# Altium PCB PCB-board-2layer-1.PcbDoc
Units mm, origin at the board's own origin, x right, y up, seen from the top; angles counter-clockwise.
Board outline 30 x 45 mm, 2 copper layers (Top Layer, Bottom Layer), stack 1.299 mm thick; 49 components, 48 nets, 232 pads, 55 vias.
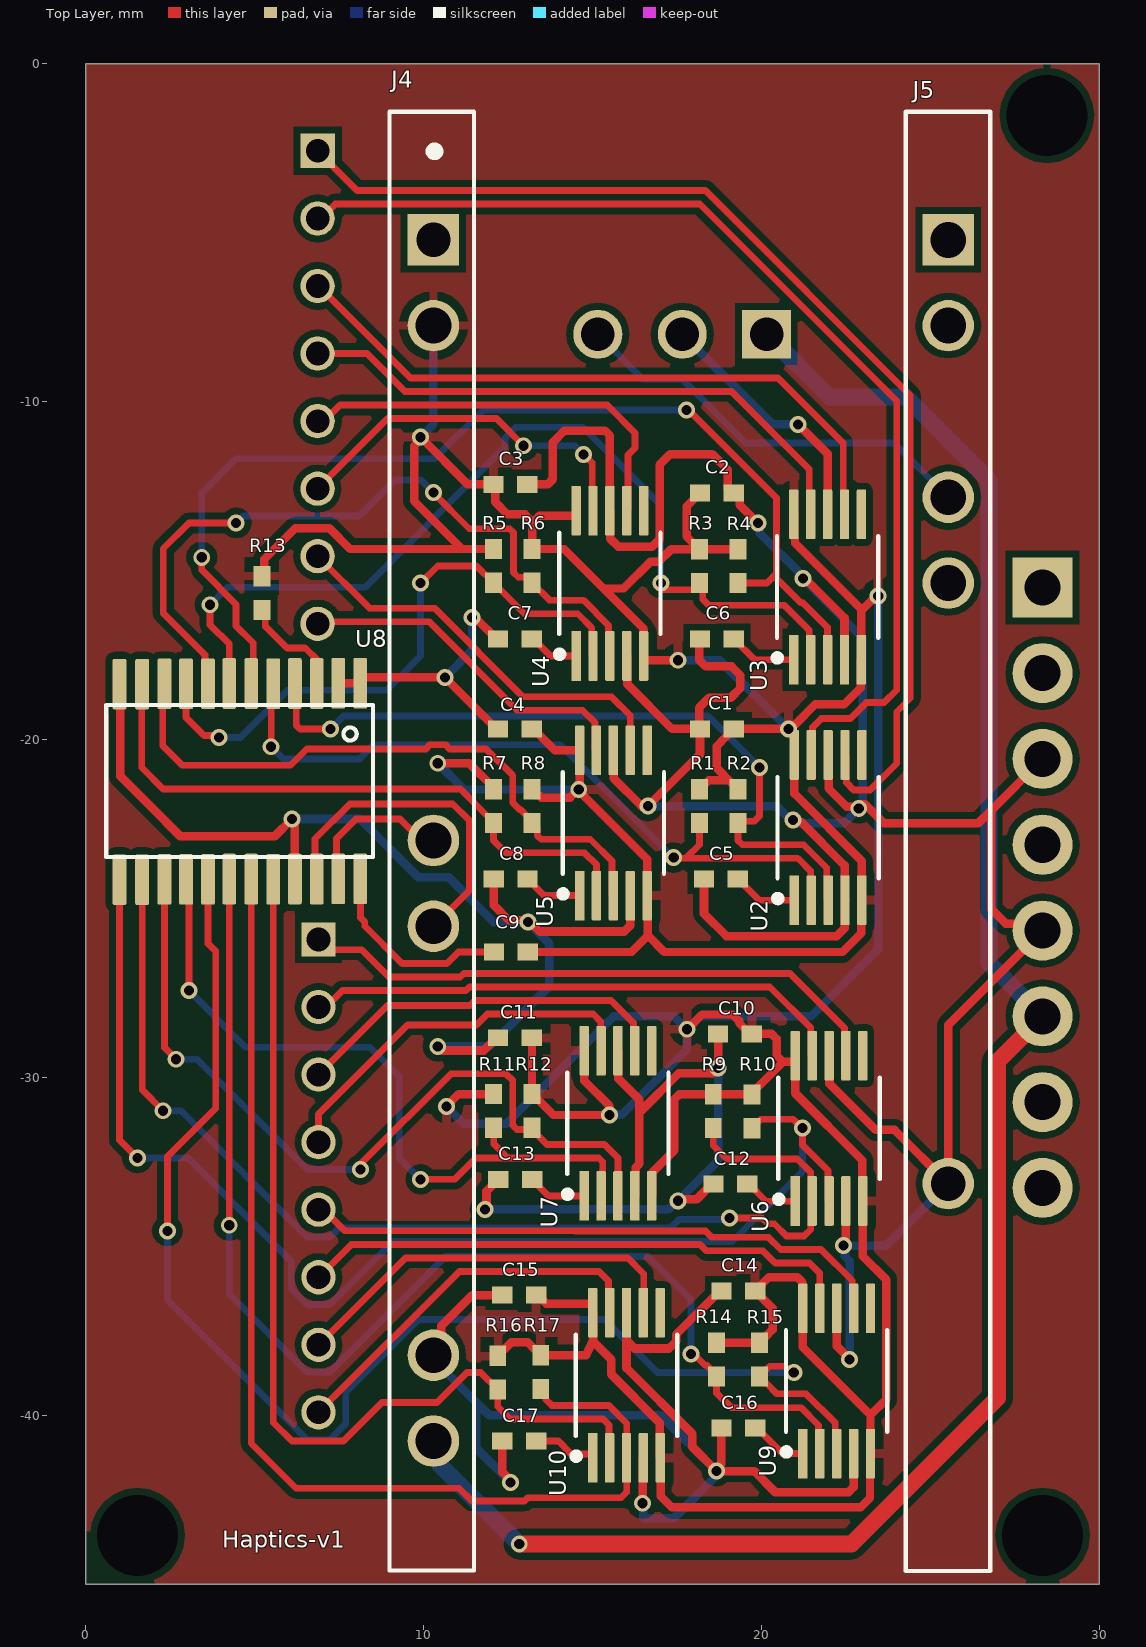
[diagram p0: Top Layer view]
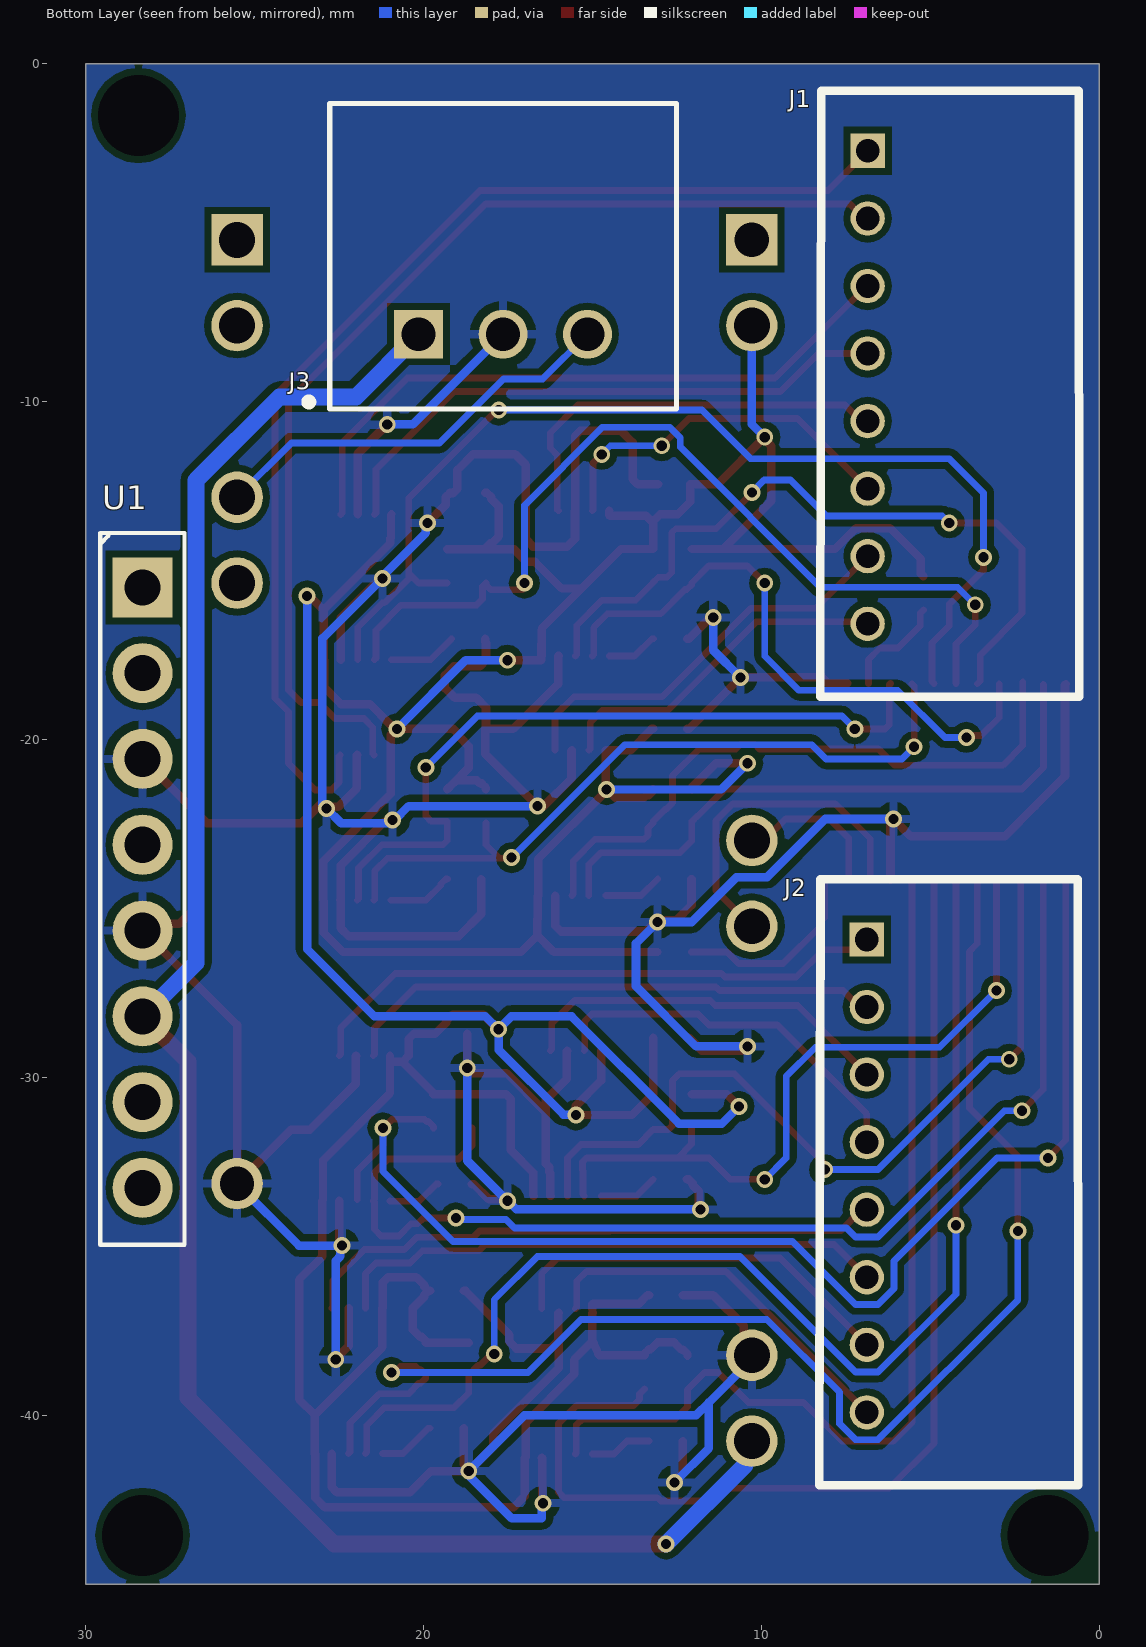
[diagram p1: Bottom Layer view, seen from below]

## Layer stack, top to bottom
Top Solder: solder mask 0.0254, SM-001, Dk 4
Top Layer: signal copper 0.035
Dielectric 1: prepreg 0.1295, PP-017, Dk 4.3
Dielectric 2: prepreg 0.1295, PP-017, Dk 4.3
Dielectric 3: core 0.7112, Core-039, Dk 4.8
Dielectric 4: prepreg 0.1295, PP-017, Dk 4.3
Dielectric 5: prepreg 0.1295, PP-017, Dk 4.3
Bottom Layer: signal copper 0.035
Bottom Solder: solder mask 0.0254, SM-001, Dk 4

## Board outline
0,-45 0,0 30,0 30,-45

## Design rules (kind name [scope] priority, off if disabled: settings)
Clearance [All] p1: gap=0.2 ignorepadtopadclearanceinfootprint=FALSE
ComponentClearance [All] p1: gap=0 collisioncheckmode=3 verticalgap=2540 showdistances=FALSE
HoleSize [All] p1: absolutevalues=TRUE maxlimit=4 minlimit=0.7 maxpercent=80.000 minpercent=20.000
HoleToHoleClearance [All] p1: gap=0.15 allowstackedmicrovias=TRUE
MinimumSolderMaskSliver [All] p1: minsoldermaskwidth=0.01
PlaneConnect [All] p1: planeconnectstyle=Relief reliefexpansion=0.508 reliefentries=4 reliefconductorwidth=0.5 reliefairgap=0.3
PolygonConnect [All] p1: connectstyle=Relief reliefconductorwidth=0.254 reliefentries=4 polygonreliefangle="90 Angle" airgapwidth=0.254
RoutingVias [All] p1: holewidth=0.3 width=0.5 viastyle="Through Hole" minholewidth=0.3 minwidth=0.5 maxholewidth=1.5 maxwidth=3
SilkToSilkClearance [All] p1: silktosilkclearance=0.01
SilkToSolderMaskClearance [IsPad] p1: minsilkscreentomaskgap=0.01 clearancetoexposedcopper=TRUE
SolderMaskExpansion [All] p1: expansion=0.102 istentingtop=FALSE
Width [All] p1: maxlimit=2 minlimit=0.2 preferedwidth=0.5
23 further rules are at their usual default settings.

## Classes and differential pairs
component class vtf-schem-v1: C1 C2 C3 C4 C5 C6 C7 C8 C9 C10 C11 C12 C13 C14 C15 C16 C17 R1 R2 R3 R4 R5 R6 R7 R8 R9 R10 R11 R12 R13 R14 R15 R16 R17 U2 U3 U4 U5 U6 U7 U8 U9 U10
component class main-schem-v1: J1 J2 J3 U1

## Components (designator, comment, footprint, x,y, rotation, side; value= is the part's Value field where it differs from the comment)
C1 "Cap Pol3" 0402 18.677,-19.685 r180 top value=1uF
C2 "Cap Pol3" 0402 18.677,-12.7 r0 top value=1uF
C3 "Cap Pol3" 0402 12.565,-12.446 r0 top value=1uF
C4 "Cap Pol3" 0402 12.7,-19.685 r180 top value=1uF
C5 "Cap Pol3" 0402 18.796,-24.13 r180 top value=1uF
C6 "Cap Pol3" 0402 18.677,-17.018 r180 top value=1uF
C7 "Cap Pol3" 0402 12.7,-17.018 r180 top value=1uF
C8 "Cap Pol3" 0402 12.573,-24.13 r180 top value=1uF
C9 "Cap Pol3" 0402 12.581,-26.289 r180 top value=1uF
C10 "Cap Pol3" 0402 19.213,-28.714 r180 top value=1uF
C11 "Cap Pol3" 0402 12.7,-28.829 r180 top value=1uF
C12 "Cap Pol3" 0402 19.078,-33.159 r180 top value=1uF
C13 "Cap Pol3" 0402 12.708,-33.02 r180 top value=1uF
C14 "Cap Pol3" 0402 19.312,-36.322 r180 top value=1uF
C15 "Cap Pol3" 0402 12.827,-36.449 r180 top value=1uF
C16 "Cap Pol3" 0402 19.312,-40.386 r180 top value=1uF
C17 "Cap Pol3" 0402 12.827,-40.767 r180 top value=1uF
J1 "8-pin-connector" 8-PIN-CONNECTOR 8.229,-0.785 r180 bottom
J2 "8-pin-connector" 8-PIN-CONNECTOR 8.255,-24.13 r180 bottom
J3 "3-pin-connector" "3-pin-connector - duplicate" 22.943,-1.035 r180 bottom
J4 "A" "15-PIN-CONNECTOR  a - duplicate" 8.987,-1.417 r0 top
J5 "15-pin-connector b" "15-PIN-CONNECTOR b - duplicate" 25.527,-22.987 r0 top
R1 "Res3" 0402 18.161,-21.971 r270 top value=2.2K
R2 "Res3" 0402 19.304,-21.971 r270 top value=2.2K
R3 "Res3" 0402 18.161,-14.867 r270 top value=2.2K
R4 "Res3" 0402 19.304,-14.867 r270 top value=2.2K
R5 "Res3" 0402 12.065,-14.859 r270 top value=2.2K
R6 "Res3" 0402 13.208,-14.859 r270 top value=2.2K
R7 "Res3" 0402 12.065,-21.971 r270 top value=2.2K
R8 "Res3" 0402 13.208,-21.971 r270 top value=2.2K
R9 "Res3" 0402 18.57,-31 r270 top value=2.2K
R10 "Res3" 0402 19.713,-31.008 r270 top value=2.2K
R11 "Res3" 0402 12.065,-30.996 r270 top value=2.2K
R12 "Res3" 0402 13.208,-30.996 r270 top value=2.2K
R13 "Res3" 0402 5.207,-15.664 r270 top value=10K
R14 "Res3" 0402 18.669,-38.354 r270 top value=2.2K
R15 "Res3" 0402 19.939,-38.354 r270 top value=2.2K
R16 "Res3" 0402 12.192,-38.743 r270 top value=2.2K
R17 "Res3" 0402 13.462,-38.727 r270 top value=2.2K
U1 "Powerboost 500" "PowerBoost 500" 29.581,-13.884 r180 bottom
U2 "DRV2605LDGST" Driver 21.971,-22.606 r90 top
U3 "DRV2605LDGST" Driver 21.955,-15.485 r90 top
U4 "DRV2605LDGST" Driver 15.51,-15.376 r90 top
U5 "DRV2605LDGST" Driver 15.613,-22.47 r90 top
U6 "DRV2605LDGST" Driver 21.999,-31.508 r90 top
U7 "DRV2605LDGST" Driver 15.748,-31.36 r90 top
U8 "I2C Bus" "I2C bus" 8.5,-18.975 r270 top
U9 "DRV2605LDGST" Driver 22.225,-38.989 r90 top
U10 "DRV2605LDGST" Driver 16.002,-39.116 r90 top

## Footprints (in the part's own frame and the unit in brackets; to place one, negate y for a bottom-side part, rotate by r counter-clockwise, add the part's x,y. Pads: shape width x height; smd on the part's side, far side on the other; paste and mask are expansions set on the pad)
"3-pin-connector - duplicate" [mm] "through hole"
  rect 1.449x1.449 hole 1: 1(2.79,-6.966)
  round 1.449 hole 1: 2(5.29,-6.966) 3(7.79,-6.966)
  silkscreen extent -0.55,-9.18 10.42,-0.14, body extent 2.79,-6.97 3.04,-6.71, height 0.25
8-PIN-CONNECTOR [mil]
  rect 40x40 hole 27.56: 1(53.97,-70.39)
  round 40 hole 27.56: 2(53.97,-149.13) 3(53.97,-227.87) 4(53.97,-306.61) 5(53.97,-385.35) 6(53.97,-464.09) 7(53.97,-542.83) 8(53.97,-621.58)
  silkscreen extent -1,-707 301,0
"15-PIN-CONNECTOR  a - duplicate" [mil] "Arduino Nano 33 BLE a"
  rect 60x60 hole 40: 1(51.18,-149.21)
  round 60 hole 41.77: 2(51.18,-249.21) 8(51.18,-849.21) 9(51.18,-949.21) 14(51.18,-1449.21) 15(51.18,-1549.21)
  round 60 on Mech1: 3(51.18,-349.21) 4(51.18,-449.21) 5(51.18,-549.21) 6(51.18,-649.21) 7(51.18,-749.21) 10(51.18,-1049.21) 11(51.18,-1149.21) 12(51.18,-1249.21) 13(51.18,-1349.21)
  silkscreen extent 0,-1700 98,0
"15-PIN-CONNECTOR b - duplicate" [mil] "Arduino Nano 33 BLE b"
  rect 60x60 hole 41.77: 16(0,700)
  round 60 hole 41.77: 17(0,600) 19(0,400) 20(0,300)
  round 60 on Mech1: 18(0,500) 21(0,200) 22(0,100) 23(0,0) 24(0,-100) 25(0,-200) 26(0,-300) 28(0,-500) 29(0,-600) 30(0,-700)
  round 60 hole 40: 27(0,-400)
  silkscreen extent -50,-852 49,849
0402 [mm] "Chip Capacitor, Body 1.0x0.5mm, IPC High Density"
  rect 0.6x0.5 smd: 1(-0.5,0) 2(0.5,0)
  body extent -0.55,-0.3 0.55,0.3, height 1.3
Driver [mm] "DRV2605LDGST"
  rect 1.47x0.28 smd: 1(-2.15,1)
  rrect25% 1.47x0.28 smd: 2(-2.15,0.5) 3(-2.15,0) 4(-2.15,-0.5) 5(-2.15,-1) 6(2.15,-1) 7(2.15,-0.5) 8(2.15,0) 9(2.15,0.5) 10(2.15,1)
  silkscreen extent -2.2,-1.5 1.5,1.59
"I2C bus" [mm] "PI4MSD5V9548A"
  rrect25% 1.5x0.41 smd: 1(-0.64,-0.38) 2(-0.64,-1.03) 3(-0.635,-1.666) 4(-0.635,-2.316) 5(-0.625,-2.956) 6(-0.635,-3.606) 7(-0.635,-4.256) 8(-0.625,-4.886) 9(-0.625,-5.536) 10(-0.625,-6.176) 11(-0.615,-6.836) 12(-0.615,-7.506) 13(5.175,-7.506) 14(5.175,-6.836) 15(5.165,-6.176) 16(5.165,-5.536) 17(5.165,-4.886) 18(5.155,-4.256) 19(5.155,-3.606) 20(5.165,-2.956) 21(5.155,-2.316) 22(5.155,-1.666) 23(5.15,-1.03) 24(5.15,-0.38)
  silkscreen extent 0,-7.9 4.5,0
"PowerBoost 500" [mm] "Adafruit PowerBoost 500 + Charger"
  rect 1.778x1.778 hole 1.07: 1(1.26,-1.61)
  round 1.778 hole 1.07: 2(1.26,-4.15) 3(1.26,-6.69) 4(1.26,-9.23) 5(1.26,-11.77) 6(1.26,-14.31) 7(1.26,-16.85) 8(1.26,-19.39)
  silkscreen extent 0,-21.07 2.5,0

## Part data
C1 C2 C3 C4 C5 C6 C7 C8 C9 C10 C11 C12 C13 C14 C15 C16 C17: "Polarized Capacitor (Surface Mount)", LatestRevisionDate=29-May-2009, LatestRevisionNote="IPC-7351 Footprint Added.", PackageDescription="Chip Capacitor", Published=8-Jun-2000, Publisher="Altium Limited"
  C1 C2 C3 C4 C6 C7 C8 C9 C10 C11 C12 C13 C14 C15 C16 C17: PackageReference=C0805
  C5: PackageReference=0402
J4: library part 15-pin-connector
R1 R2 R3 R4 R5 R6 R7 R8 R9 R10 R11 R12 R13 R14 R15 R16 R17: "Resistor", LatestRevisionDate=29-May-2009, LatestRevisionNote="IPC-7351 Footprint Added.", PackageDescription="Chip Resistor", PackageReference=J1-0603, Published=8-Jun-2000, Publisher="Altium Limited"

## Free pads (board coordinates)
  round 1.449 hole 2.4: MH1(28.448,-1.524) MH2(28.321,-43.561) MH3(1.524,-43.561)

## Via types
v1: diameter 0.5, hole 0.3, Top Layer to Bottom Layer, 55 vias

## Nets (pads, with @x,y where several pads share a name; then routed paths per layer and width w, separated by ;. In a path a pad name is that pad's centre, name@x,y a point inside that pad or via, vN(x,y) a via of type N, cw(c..) or ccw(c..) an arc to the next point about the centre after c; other vN are vias at no path point)
3V3: C1.1 C2.1 C3.1 C4.1 C9.1 C10.1 C11.1 C14.1 C15.1 J4.2 R1.1 R2.1 R3.1 R4.1 R5.1 R6.1 R7.1 R8.1 R9.1 R10.1 R11.1 R12.1 R13.1 R14.1 R15.1 R16.1 R17.1 U2.5 U2.10 U3.5 U3.10 U4.5 U4.10 U5.5 U5.10 U6.5 U6.10 U7.5 U7.10 U9.5 U9.10 U10.5 U10.10 | length 178.3
  Top Layer w0.25: R13.1 5.281,-15.09 5.281,-14.658 6.199,-13.74 7.203,-13.74 7.822,-14.359 11.133,-14.359 ; v1(10.414,-20.701) 11.345,-20.701 12.065,-21.421 R7.1 ; v1(10.668,-30.861) 11.033,-30.496 R11.1 ; R5.1 11.133,-14.359 ; R16.1 12.192,-38.193 12.317,-38.068 12.367,-38.068 12.589,-37.846 13.081,-37.846 13.287,-38.052 13.337,-38.052 13.462,-38.177 R17.1 14.811,-38.227 14.877,-38.076 15.017,-37.75 ; C9.1 16.153,-26.289 16.637,-25.805 ; C11.1 13.204,-28.833 13.204,-30.492 R12.1 13.218,-30.496 13.837,-31.115 v1(15.494,-31.115) 15.494,-30.841 14.748,-30.094 U7.10 ; C4.1 13.25,-19.685 13.885,-20.32 U5.10 14.613,-21.463 v1@14.609,-21.467 ; R8.1 13.208,-21.521 13.333,-21.646 13.408,-21.646 13.479,-21.717 14.334,-21.717 14.572,-21.479 v1(14.589,-21.479) ; C15.1 13.377,-36.449 13.631,-36.703 14.995,-36.703 15.01,-36.718 U10.10@15.01,-36.848 ; U4.10 14.51,-13.361 14.495,-13.376 13.421,-13.376 13.208,-13.589 ; v1@14.613,-21.478 14.613,-21.538 16.613,-23.538 U5.5 16.628,-24.635 16.628,-25.313 16.637,-25.322 16.637,-25.805 ; U10.10 15.017,-36.981 15.017,-37.75 ; 16.495,-16.697 15.326,-15.528 ; U4.5 16.51,-16.764 16.519,-17.526 16.521,-17.653 v1(17.526,-17.653) ; U7.5 16.763,-33.495 16.763,-32.817 17.42,-32.16 17.42,-30.646 17.567,-30.499 18.569,-30.499 R9.1 18.574,-30.504 19.709,-30.504 R10.1 ; U10.5 16.987,-41.251 16.987,-40.228 15.55,-38.791 15.55,-38.357 15.017,-37.824 15.017,-37.75 ; U10.5@17.01,-41.266 17.01,-42.399 17.343,-42.732 22.931,-42.732 23.21,-42.453 23.21,-41.154 U9.5 23.225,-39.997 ; v1(17.792,-28.575) 17.805,-28.575 18.24,-28.139 19.147,-28.139 19.338,-28.33 19.338,-28.389 19.663,-28.714 C10.1 20.301,-28.714 20.447,-28.861 20.447,-29.358 20.63,-29.541 ; R1.1 18.161,-21.421 18.286,-21.296 18.345,-21.296 18.432,-21.209 19.033,-21.209 19.12,-21.296 R2.1@19.129,-21.296 ; C2.1 18.127,-12.7 18.002,-12.825 18.002,-12.875 17.78,-13.097 17.78,-13.986 17.986,-14.192 18.036,-14.192 18.161,-14.317 R3.1 ; R14.1 R15.1 19.939,-37.804 20.064,-37.679 20.114,-37.679 20.326,-37.467 20.326,-36.834 19.987,-36.495 19.987,-36.447 C14.1@19.862,-36.322 ; R2.1 R2.1@19.129,-21.296 ; R4.1 R3.1 ; R10.1@19.713,-30.458 20.63,-29.541 ; C14.1 C14.1@19.862,-36.322 ; U3.10 20.97,-13.35 20.97,-14.028 20.99,-14.048 20.99,-14.184 22.955,-16.149 ; v1@20.986,-19.561 21.595,-18.953 22.451,-18.953 22.94,-18.464 22.94,-17.65 U3.5 22.955,-16.149 ; U6.10@20.999,-29.602 20.999,-30.472 22.984,-32.457 22.984,-33.643 U6.5 22.999,-35.298 23.69,-35.99 23.69,-39.532 23.225,-39.997 ; U6.10 20.999,-29.526 20.984,-29.541 20.63,-29.541 ; v1(23.453,-15.748) 23.385,-15.748 22.984,-16.149 22.955,-16.149 ; 11.133,-14.359 9.712,-12.938 9.712,-11.311 9.906,-11.117 v1(9.906,-11.049) 11.303,-12.446 C3.1 12.115,-12.446 12.115,-12.966 12.483,-13.334 13.003,-13.334 13.208,-13.539 13.208,-13.589 ; 13.208,-13.589 R6.1 14.157,-14.359 15.326,-15.528 ; 15.326,-15.528 15.917,-15.528 16.705,-14.74 16.952,-14.74 17.325,-14.367 R3.1 ; 16.637,-25.805 17.121,-26.289 22.394,-26.289 22.956,-25.727 22.956,-24.771 U2.5 22.971,-23.602 20.971,-21.602 U2.10 20.971,-19.861 v1(20.795,-19.685) C1.1 19.127,-19.685 19.002,-19.81 19.002,-19.86 18.802,-20.06 18.802,-20.07 18.669,-20.203 18.669,-20.836 R2.1@19.129,-21.296 ; C14.1@19.862,-36.322 19.987,-36.197 19.987,-36.147 20.221,-35.913 20.227,-35.918 21.064,-35.918 21.21,-36.065 21.21,-36.824 U9.10 21.225,-37.997 23.225,-39.997
  Bottom Layer w0.25: v1(9.906,-11.049) 10.287,-10.668 J4.2 ; v1(10.414,-20.701) 11.192,-21.479 v1(14.589,-21.479) ; v1(10.668,-30.861) 11.176,-31.369 12.446,-31.369 15.621,-28.194 17.411,-28.194 v1(17.792,-28.575) ; v1(15.494,-31.115) 15.505,-31.104 15.867,-31.104 17.78,-29.191 17.78,-28.587 v1(17.792,-28.575) ; v1(17.526,-17.653) 18.763,-17.653 v1(20.795,-19.685) ; v1(23.453,-15.748) 23.453,-26.204 21.463,-28.194 18.173,-28.194 v1(17.792,-28.575)
5V: J3.1 J4.15 U1.6 | length 56.8
  Top Layer w0.5: v1(12.827,-43.815) 22.661,-43.815 26.982,-39.494 26.982,-29.533 U1.6
  Bottom Layer w0.5: J4.15 10.483,-40.963 10.483,-41.471 v1(12.827,-43.815) ; J3.1 22.009,-9.857 24.271,-9.857 26.739,-12.325 26.739,-26.612 U1.6
DXL_DATA: J3.3 J5.19 | length 12.4
  Bottom Layer w0.2: J3.3 16.479,-9.327 17.64,-9.327 19.531,-11.218 23.918,-11.218 J5.19
GND: C1.2 C2.2 C3.2 C4.2 C5.2 C6.2 C7.2 C8.2 C10.2 C11.2 C12.2 C13.2 C14.2 C15.2 C16.2 C17.2 J3.2 J4.14 J5.27 U1.3 U1.5 U2.4 U2.8 U3.4 U3.8 U4.4 U4.8 U5.4 U5.8 U6.4 U6.8 U7.4 U7.8 U8.1 U8.2 U8.12 U8.21 U9.4 U9.8 U10.4 U10.8 | length 202.9
  Top Layer w0.254: U8.12 1.016,-18.383 1.016,-21.082 1.905,-21.971 2.794,-22.86 5.588,-22.86 v1(6.096,-22.352) ; v1@6.029,-22.352 6.184,-22.506 U8.21 ; U8.2 8.042,-18.335 8.12,-18.257 8.12,-18.239 8.198,-18.161 v1(10.626,-18.161) 12.15,-19.685 C4.2 ; J4.14 10.524,-37.99 10.524,-37.355 11.43,-36.449 C15.2 ; v1(10.414,-29.083) 10.537,-29.206 11.773,-29.206 12.15,-28.829 C11.2 ; v1(11.43,-16.383) 11.477,-16.43 11.562,-16.43 12.15,-17.018 C7.2 ; v1(11.811,-33.909) 11.858,-33.862 11.858,-33.37 12.035,-33.193 12.035,-33.143 12.158,-33.02 C13.2 ; C8.2 12.073,-24.9 12.526,-25.353 13.034,-25.353 v1(13.081,-25.4) 13.148,-25.4 13.43,-25.682 15.935,-25.682 16.112,-25.505 U5.4@16.112,-24.621 ; C17.2 12.327,-41.682 12.573,-41.928 v1(12.573,-41.995) ; C3.2 13.668,-12.446 13.817,-12.297 13.817,-11.202 14.166,-10.853 15.361,-10.853 15.51,-11.002 U4.8 15.523,-13.239 15.523,-14.056 15.755,-14.288 16.765,-14.288 16.983,-14.07 16.983,-11.868 17.294,-11.557 18.542,-11.557 19.004,-12.019 19.004,-12.577 19.127,-12.7 C2.2 19.227,-12.7 19.35,-12.823 19.35,-13.048 v1(19.891,-13.589) ; U5.8 15.626,-20.333 15.626,-21.15 16.447,-21.971 v1(16.637,-21.971) 18.177,-20.431 C1.2 C1.2@18.157,-19.685 ; U7.8 15.761,-29.223 15.761,-30.04 16.383,-30.662 16.383,-30.988 ; 16.002,-37.796 16.002,-38.604 17.947,-40.549 17.947,-40.934 v1(18.669,-41.656) 19.782,-41.656 20.406,-42.28 22.576,-42.28 22.725,-42.131 U9.4 ; U10.8 16.015,-36.979 16.015,-37.796 16.247,-38.028 17.257,-38.028 17.469,-37.816 17.469,-37.615 18.762,-36.322 C14.2 ; U4.4 16.023,-17.539 16.023,-18.356 17.352,-19.685 C1.2@18.157,-19.685 ; U7.4 16.261,-33.497 16.261,-32.822 16.281,-32.802 16.281,-32.66 16.383,-32.558 16.383,-30.988 ; v1(16.474,-42.607) 16.489,-42.592 16.489,-41.279 U10.4 ; v1(17.526,-33.655) 17.573,-33.608 18.079,-33.608 18.528,-33.159 C12.2 ; C6.2 18.177,-17.121 18.157,-17.141 18.157,-17.649 18.344,-17.836 19.11,-17.836 19.375,-18.101 19.375,-18.475 19.086,-18.765 18.446,-18.765 18.157,-19.054 C1.2@18.157,-19.685 ; C5.2 18.296,-25.154 18.96,-25.818 22.226,-25.818 22.458,-25.586 22.458,-24.769 U2.4 22.458,-24.743 22.458,-23.728 21.158,-22.428 20.973,-22.428 v1(20.926,-22.381) ; C10.2 v1(18.713,-29.725) 18.564,-29.873 17.554,-29.873 16.439,-30.988 16.383,-30.988 ; 18.812,-41.446 C16.2 ; v1(21.082,-10.668) 21.955,-11.541 U3.8 ; v1(21.224,-15.232) 21.287,-15.232 22.455,-16.399 U3.4 ; U2.8 21.984,-20.469 21.984,-21.448 22.53,-21.994 22.831,-21.994 v1(22.878,-22.041) ; U6.8 22.012,-29.371 22.012,-30.188 23.379,-31.556 23.936,-31.556 J5.27 25.527,-28.448 28.293,-25.682 U1.5@28.293,-25.654 ; U9.8 22.225,-37.955 22.606,-38.336 v1(22.606,-38.354) ; v1(22.424,-34.981) 22.424,-34.914 22.499,-34.839 U6.4 ; v1@22.878,-21.918 23.061,-21.918 23.622,-22.479 26.416,-22.479 26.797,-22.098 ; U1.5 U1.5@28.293,-25.654 ; U1.3 26.797,-22.098 ; 26.797,-22.098 26.797,-25.019 27.232,-25.454 28.094,-25.454 U1.5@28.293,-25.654
  Bottom Layer w0.254: v1(6.096,-22.352) 8.112,-22.352 9.836,-24.076 10.741,-24.076 12.065,-25.4 v1(13.081,-25.4) 13.716,-26.035 13.716,-27.305 11.938,-29.083 v1(10.414,-29.083) ; J4.14 10.287,-38.354 11.557,-39.624 ; v1(10.626,-18.161) 11.43,-17.357 v1(11.43,-16.383) ; v1(11.811,-33.909) 17.254,-33.909 17.508,-33.655 v1(17.526,-33.655) 18.713,-32.468 v1(18.713,-29.725) ; v1@12.573,-41.999 v1(12.573,-41.995) 11.557,-40.979 11.557,-39.624 ; v1(16.474,-42.607) 16.502,-42.635 16.502,-43.053 17.399,-43.053 18.669,-41.783 v1(18.669,-41.656) 17.018,-40.005 11.938,-40.005 11.557,-39.624 ; v1(16.637,-21.971) 20.449,-21.971 20.859,-22.381 v1(20.926,-22.381) ; J3.2@17.56,-7.908 J3.2 20.32,-10.668 v1(21.082,-10.668) ; v1(19.891,-13.589) 19.938,-13.636 19.938,-13.883 21.209,-15.153 21.209,-15.216 23.001,-17.008 v1@23.001,-21.918 ; v1@21.082,-22.479 22.44,-22.479 v1(22.878,-22.041) ; v1(22.606,-38.354) 22.606,-35.433 22.471,-35.298 22.471,-35.028 v1(22.424,-34.981) 23.693,-34.981 J5.27 ; v1@22.878,-21.985 v1@22.878,-21.918
NetC5_1: C5.1 U2.1 | length 2
  Top Layer w0.2: C5.1 19.346,-24.13 19.496,-24.28 19.496,-24.322 19.93,-24.756 U2.1
NetC6_1: C6.1 U3.1 | length 2
  Top Layer w0.2: C6.1 19.794,-17.635 U3.1
NetC7_1: C7.1 U4.1 | length 1.5
  Top Layer w0.2: C7.1 13.25,-17.018 13.758,-17.526 U4.1
NetC8_1: C8.1 U5.1 | length 1.7
  Top Layer w0.2: C8.1 13.563,-24.62 U5.1
NetC9_2: C9.2 U8.24 | length 5.9
  Top Layer w0.2: U8.24 8.128,-24.134 8.128,-25.273 8.255,-25.4 8.255,-25.527 9.36,-26.632 10.684,-26.632 11.023,-26.293 11.045,-26.293 11.049,-26.289 C9.2
NetC12_1: C12.1 U6.1 | length 1.6
  Top Layer w0.2: C12.1 19.628,-33.159 20.136,-33.667 20.99,-33.667 U6.1
NetC13_1: C13.1 U7.1 | length 1.7
  Top Layer w0.2: C13.1 13.698,-33.51 U7.1
NetC16_1: C16.1 U9.1 | length 1.7
  Top Layer w0.2: C16.1 19.862,-40.386 20.615,-41.139 U9.1
NetC17_1: C17.1 U10.1 | length 1.8
  Top Layer w0.2: C17.1 13.983,-40.767 14.364,-41.148 U10.1@15.01,-41.148
NetR13_2: R13.2 U8.3 | length 3.2
  Top Layer w0.2: R13.2 5.305,-16.262 5.305,-16.64 5.897,-17.232 5.955,-17.29 6.486,-17.29 ccw(c6.858,-16.573) 6.501,-17.298 6.834,-17.63 U8.3
OUT0+: J1.1 U2.7 | length 34.3
  Top Layer w0.2: J1.1 8.03,-3.745 18.336,-3.745 24.403,-9.812 24.403,-18.777 24.003,-19.177 24.003,-20.703 23.215,-21.491 22.727,-21.491 22.511,-21.275 22.511,-20.496 U2.7
OUT0-: J1.2 U2.9 | length 32.1
  Top Layer w0.2: J1.2 6.955,-4.573 7.383,-4.145 18.17,-4.145 24.003,-9.978 24.003,-18.531 23.63,-18.904 23.101,-18.904 22.627,-19.378 21.771,-19.378 21.511,-19.637 21.511,-20.416 U2.9
OUT1+: J1.3 U3.7 | length 19.6
  Top Layer w0.2: J1.3 6.885,-6.573 9.606,-9.294 20.486,-9.294 22.415,-11.223 22.415,-13.295 U3.7
OUT1-: J1.4 U3.9 | length 17.3
  Top Layer w0.2: J1.4 8.319,-8.573 9.44,-9.694 19.108,-9.694 21.415,-12.001 21.415,-13.295 U3.9
OUT2+: J1.5 U4.7 | length 12.3
  Top Layer w0.2: J1.5 7.053,-10.573 7.527,-10.099 15.433,-10.099 16.256,-10.922 16.256,-11.368 16.05,-11.574 16.05,-13.186 U4.7
OUT2-: J1.6 U4.9 | length 11
  Top Layer w0.2: J1.6 8.932,-10.499 12.15,-10.499 v1(12.954,-11.303) ; v1(14.732,-11.557) 14.988,-11.813 14.988,-13.204 U4.9
  Bottom Layer w0.2: v1(12.954,-11.303) 14.478,-11.303 v1(14.732,-11.557)
OUT3+: J1.7 U5.7 | length 12.2
  Top Layer w0.2: J1.7 8.395,-16.11 10.318,-16.11 12.943,-18.735 15.56,-18.735 16.113,-19.288 U5.7
OUT3-: J1.8 U5.9 | length 10.3
  Top Layer w0.2: J1.8 6.921,-16.573 6.984,-16.51 10.152,-16.51 12.777,-19.135 14.707,-19.135 15.073,-19.501 15.073,-20.28 U5.9
OUT4+: J2.1 U6.7 | length 17.1
  Top Layer w0.2: J2.1@7.192,-26.226 8.166,-26.226 8.972,-27.032 11.08,-27.032 11.188,-26.924 20.843,-26.924 22.459,-28.54 22.459,-29.318 U6.7
OUT4-: J2.2 U6.9 | length 16.1
  Top Layer w0.2: J2.2@6.985,-28.038 7.591,-27.432 11.245,-27.432 11.353,-27.324 20.243,-27.324 21.459,-28.54 21.459,-29.318 U6.9
OUT5+: J2.3 U7.7 | length 11.3
  Top Layer w0.2: J2.3 8.929,-27.873 11.37,-27.873 11.519,-27.724 15.541,-27.724 16.208,-28.391 16.208,-29.17 U7.7
OUT5-: J2.4 U7.9 | length 11.4
  Top Layer w0.2: J2.4 6.884,-31.089 9.525,-28.448 11.557,-28.448 11.881,-28.124 15.018,-28.124 15.237,-28.343 15.237,-29.199 U7.9
OUT6+: J2.5 U9.7 | length 17.5
  Top Layer w0.2: J2.5 7.037,-33.918 7.663,-34.544 14.483,-34.544 14.484,-34.545 18.347,-34.545 18.537,-34.735 20.21,-34.735 20.569,-35.093 21.758,-35.093 22.685,-36.02 22.685,-36.799 U9.7
OUT6-: J2.6 U9.9 | length 16.5
  Top Layer w0.2: J2.6@6.985,-35.817 7.857,-34.945 18.181,-34.945 18.371,-35.135 20.044,-35.135 20.403,-35.493 21.414,-35.493 21.725,-35.804 U9.9
OUT7+: J2.7 U10.7 | length 11.8
  Top Layer w0.2: J2.7@6.985,-37.817 9.457,-35.345 16.041,-35.345 16.51,-35.814 U10.7@16.51,-36.848
OUT7-: J2.8 U10.9 | length 11.3
  Top Layer w0.2: J2.8@7.141,-40.07 7.141,-39.661 11.057,-35.745 15.186,-35.745 15.47,-36.029 15.47,-36.808 U10.9@15.51,-36.848
SCL0: R1.2 U2.2 U8.5 | length 21.8
  Top Layer w0.2: v1(5.482,-20.214) 5.482,-18.412 U8.5 ; v1(17.399,-23.495) 17.418,-23.514 21.074,-23.514 21.454,-23.894 21.454,-24.739 U2.2 ; 17.78,-23.495 18.161,-23.114 R1.2
  Bottom Layer w0.2: v1(5.482,-20.214) 5.842,-20.574 8.094,-20.574 8.517,-20.151 14.039,-20.151 17.383,-23.495 v1(17.399,-23.495)
SCL1: R3.2 U3.2 U8.7 | length 27.9
  Top Layer w0.2: v1(3.675,-16.01) 3.675,-16.607 4.244,-17.175 U8.7 ; v1(17.018,-15.367) 17.018,-15.497 17.088,-15.567 18.011,-15.567 18.161,-15.417 R3.2 18.258,-15.464 18.258,-15.845 18.434,-16.021 20.67,-16.021 21.415,-16.766 21.415,-17.595 U3.2
  Bottom Layer w0.2: v1(3.675,-16.01) 4.191,-15.494 8.255,-15.494 12.404,-11.345 12.404,-11.075 12.726,-10.753 14.706,-10.753 17.018,-13.065 v1(17.018,-15.367)
SCL2: R5.2 U4.2 U8.9 | length 18.3
  Top Layer w0.2: U8.9 2.964,-19.347 3.499,-19.882 3.88,-19.882 v1(3.937,-19.939) ; v1(9.906,-15.367) 10.414,-14.859 11.565,-14.859 R5.2 12.065,-15.409 12.215,-15.559 12.265,-15.559 12.981,-16.275 14.558,-16.275 14.97,-16.687 14.97,-17.486 U4.2
  Bottom Layer w0.2: v1(3.937,-19.939) 4.572,-19.939 5.969,-18.542 8.89,-18.542 9.906,-17.526 v1(9.906,-15.367)
SCL3: R7.2 U5.2 U8.11 | length 18.4
  Top Layer w0.2: U8.11 1.651,-18.373 1.651,-20.828 2.286,-21.463 11.083,-21.463 11.891,-22.271 11.915,-22.271 12.065,-22.421 12.065,-22.987 12.43,-23.352 14.763,-23.352 15.113,-23.702 U5.2
SCL4: R9.2 U6.2 U8.14 | length 33.8
  Top Layer w0.2: U8.14 1.664,-30.366 v1(2.286,-30.988) ; R9.2 18.57,-32.016 18.97,-32.416 21.056,-32.416 21.459,-32.819 21.459,-33.618 U6.2 21.459,-33.698 21.459,-34.498 21.263,-34.693 20.734,-34.693 20.376,-34.335 20.182,-34.335 20.01,-34.163 v1(19.05,-34.163)
  Bottom Layer w0.2: v1(2.286,-30.988) 2.811,-30.988 6.549,-34.726 7.219,-34.726 7.486,-34.459 17.308,-34.459 17.562,-34.205 19.008,-34.205 v1(19.05,-34.163)
SCL5: R11.2 U7.2 U8.16 | length 21.7
  Top Layer w0.2: U8.16 3.048,-24.225 v1(3.048,-27.432) ; v1(9.906,-33.02) 10.916,-33.02 11.551,-32.385 12.48,-32.385 ; R11.2 12.073,-31.504 12.073,-31.979 12.48,-32.385 ; U7.2 15.288,-33.47 15.288,-32.768 15.298,-32.758 15.298,-32.502 15.181,-32.385 12.48,-32.385
  Bottom Layer w0.2: v1(3.048,-27.432) 4.726,-29.11 8.409,-29.11 9.271,-29.972 9.271,-32.385 v1(9.906,-33.02)
SCL6: R14.2 U8.18 U9.2 | length 36.3
  Top Layer w0.2: v1(4.244,-34.38) U8.18 ; v1(17.913,-38.185) 17.994,-38.185 18.334,-38.525 18.39,-38.525 18.669,-38.804 18.669,-39.342 19.106,-39.779 21.164,-39.779 21.685,-40.3 21.685,-41.099 U9.2
  Bottom Layer w0.2: v1(4.244,-34.38) 4.244,-36.42 6.549,-38.726 7.219,-38.726 10.639,-35.306 16.637,-35.306 17.913,-36.582 v1(17.913,-38.185)
SCL7: R16.2 U8.20 U10.2 | length 28.9
  Top Layer w0.2: U8.20 5.544,-40.215 6.096,-40.767 7.62,-40.767 8.763,-39.624 10.392,-39.624 11.281,-38.735 11.684,-38.735 R16.2 12.192,-39.751 12.554,-40.113 15.307,-40.113 15.486,-40.293 15.486,-41.124 U10.2@15.51,-41.148
SCL_IN: J4.9 U8.22 | length 9.9
  Top Layer w0.2: U8.22@6.781,-24.078 6.781,-22.937 7.811,-21.907 10.858,-21.907 11.349,-22.398 11.349,-24.465 J4.9
SDA0: R2.2 U2.3 U8.4 | length 22.4
  Top Layer w0.2: U8.4 6.223,-18.38 6.223,-19.568 6.34,-19.685 v1(7.239,-19.685) ; v1(19.939,-20.828) 19.939,-22.263 19.781,-22.421 19.304,-22.421 19.304,-22.987 19.431,-23.114 20.728,-23.114 21.24,-23.114 21.931,-23.805 21.931,-24.716 U2.3
  Bottom Layer w0.2: v1(7.239,-19.685) 7.62,-19.304 18.415,-19.304 v1(19.939,-20.828)
SDA1: R4.2 U3.3 U8.6 | length 32.1
  Top Layer w0.2: v1(3.429,-14.605) 3.429,-14.986 4.445,-16.002 4.445,-16.637 4.953,-17.145 4.953,-18.281 U8.6 ; v1(17.78,-10.244) 17.833,-10.244 20.441,-12.853 20.441,-15.227 21.167,-15.952 21.23,-15.952 21.955,-16.677 U3.3 ; R4.2 20.157,-15.367 20.441,-15.082
  Bottom Layer w0.2: v1(3.429,-14.605) 3.429,-12.7 4.445,-11.684 10.324,-11.684 11.764,-10.244 v1(17.78,-10.244)
SDA2: R6.2 U4.3 U8.8 | length 22
  Top Layer w0.2: U8.8 3.522,-18.259 3.522,-17.492 2.286,-16.256 2.286,-14.351 3.048,-13.589 v1(4.445,-13.589) ; v1(10.287,-12.684) 10.287,-12.7 11.346,-13.759 12.541,-13.759 12.658,-13.876 12.658,-15.057 12.797,-15.196 13.058,-15.196 13.208,-15.346 R6.2 13.724,-15.875 14.258,-15.875 14.724,-15.875 15.47,-16.621 15.47,-17.486 U4.3
  Bottom Layer w0.2: v1(4.445,-13.589) 4.653,-13.381 8.082,-13.381 9.144,-12.319 9.922,-12.319 v1(10.287,-12.684)
SDA3: R8.2 U5.3 U8.10 | length 18.8
  Top Layer w0.2: U8.10@2.271,-18.298 2.271,-20.178 2.857,-20.764 6.049,-20.764 6.537,-20.276 10.061,-20.276 10.186,-20.151 10.642,-20.151 10.767,-20.276 11.844,-20.276 12.637,-21.068 12.637,-21.874 12.834,-22.071 12.858,-22.071 13.208,-22.421 R8.2 13.358,-22.621 13.358,-22.835 13.475,-22.952 14.053,-22.952 14.344,-22.952 14.929,-22.952 15.573,-23.596 15.573,-24.58 U5.3
SDA4: R10.2 U6.3 U8.13 | length 37.5
  Top Layer w0.2: U8.13 0.994,-31.855 v1(1.524,-32.385) ; R10.2 19.713,-31.458 19.863,-31.308 19.913,-31.308 19.98,-31.242 20.942,-31.242 21.196,-31.496 v1(21.209,-31.496) 21.209,-32.004 21.965,-32.76 U6.3@21.965,-33.625
  Bottom Layer w0.2: v1(1.524,-32.385) 3.026,-32.385 6.076,-35.435 6.076,-36.253 6.549,-36.726 7.219,-36.726 9.086,-34.859 19.132,-34.859 21.209,-32.782 v1(21.209,-31.496)
SDA5: R12.2 U7.3 U8.15 | length 24.1
  Top Layer w0.2: U8.15 2.324,-29.121 v1(2.667,-29.464) ; v1(8.128,-32.731) 8.128,-32.57 10.802,-29.896 12.439,-29.896 12.636,-30.093 12.636,-31.429 12.754,-31.546 13.208,-31.546 13.647,-31.985 15.347,-31.985 15.748,-32.386 U7.3
  Bottom Layer w0.2: v1(2.667,-29.464) 3.287,-29.464 6.555,-32.731 v1(8.128,-32.731)
SDA6: R15.2 U8.17 U9.3 | length 41.1
  Top Layer w0.2: v1(2.413,-34.544) 2.413,-32.34 3.844,-30.91 3.844,-26.272 3.614,-26.042 U8.17 ; v1(20.955,-38.735) 20.874,-38.735 20.691,-38.552 20.241,-38.552 20.139,-38.654 20.089,-38.654 19.939,-38.804 19.939,-38.904 20.089,-39.054 20.139,-39.054 20.455,-39.37 21.321,-39.37 22.185,-40.234 22.185,-41.099 U9.3
  Bottom Layer w0.2: v1(2.413,-34.544) 2.413,-36.59 6.549,-40.726 7.219,-40.726 7.692,-40.253 7.692,-39.32 9.847,-37.165 15.346,-37.165 16.916,-38.735 v1(20.955,-38.735)
SDA7: R17.2 U8.19 U10.3 | length 33.7
  Top Layer w0.2: U8.19 4.894,-40.835 6.223,-42.164 11.049,-42.164 11.43,-42.545 12.982,-42.545 13.085,-42.442 15.846,-42.442 16.01,-42.278 16.01,-41.266 16.01,-40.245 15.478,-39.713 13.79,-39.713 13.612,-39.535 13.612,-39.377 R17.2
SDA_IN: J4.8 U8.23 | length 4.5
  Top Layer w0.2: U8.23@7.417,-24.073 7.417,-22.926 7.991,-22.352 9.294,-22.352 9.929,-22.987 J4.8
pads on no net: J4.1 J4.3 J4.4 J4.5 J4.6 J4.7 J4.10 J4.11 J4.12 J4.13 J5.16 J5.17 J5.18 J5.20 J5.21 J5.22 J5.23 J5.24 J5.25 J5.26 J5.28 J5.29 J5.30 U1.1 U1.2 U1.4 U1.7 U1.8 U2.6 U3.6 U4.6 U5.6 U6.6 U7.6 U9.6 U10.6

## Polygon pours and split planes (outlines as drawn)
GND on Bottom Layer "GND_L02_P002" (solid, pour order 2): 0,-45 0,0 30,0 30,-45
3V3 on Top Layer "3V3_L01_P001" (solid, remove dead copper, pour order 1): 0,-45 0,0 30,0 30,-45

## Silkscreen, mask and mechanical layers (free items; w line width, h text height)
Top Overlay:
  text "Haptics-v1" at 4.037,-43.929 h0.5
Mechanical 1:
  lines w0.254: 0.035,2.464 0.035,2.972 ; 1.559,2.21 0.035,2.718 ; 1.559,3.226 0.035,2.718 ; 9.931,2.718 0.035,2.718 ; 20.139,2.718 30.035,2.718 ; 28.511,2.21 30.035,2.718 ; 28.511,3.226 30.035,2.718 ; 30.035,2.464 30.035,2.972 ; 31.191,-43.66 31.699,-45.184 ; 31.191,-1.708 31.699,-0.184 ; 31.445,-45.184 31.953,-45.184 ; 31.445,-0.184 31.953,-0.184 ; 31.699,-27.788 31.699,-45.184 ; 31.699,-17.58 31.699,-0.184 ; 32.207,-43.66 31.699,-45.184 ; 32.207,-1.708 31.699,-0.184 ; 0,-45 0,0 30,0 30,-45 0,-45
  text "30 (mm)" at 10.185,1.803 h1.52
  text "45 (mm)" at 32.614,-27.534 h1.52 r90